# Altium PCB PANEL.PcbDoc
Units mm, origin at the board's own origin, x right, y up, seen from the top; angles counter-clockwise.
Board outline 200 x 110 mm, 4 copper layers (Top Layer, GND, Internal Plane 2, Bottom Layer), stack 2.281 mm thick; 2 components, 0 nets, 69 pads, 0 vias.
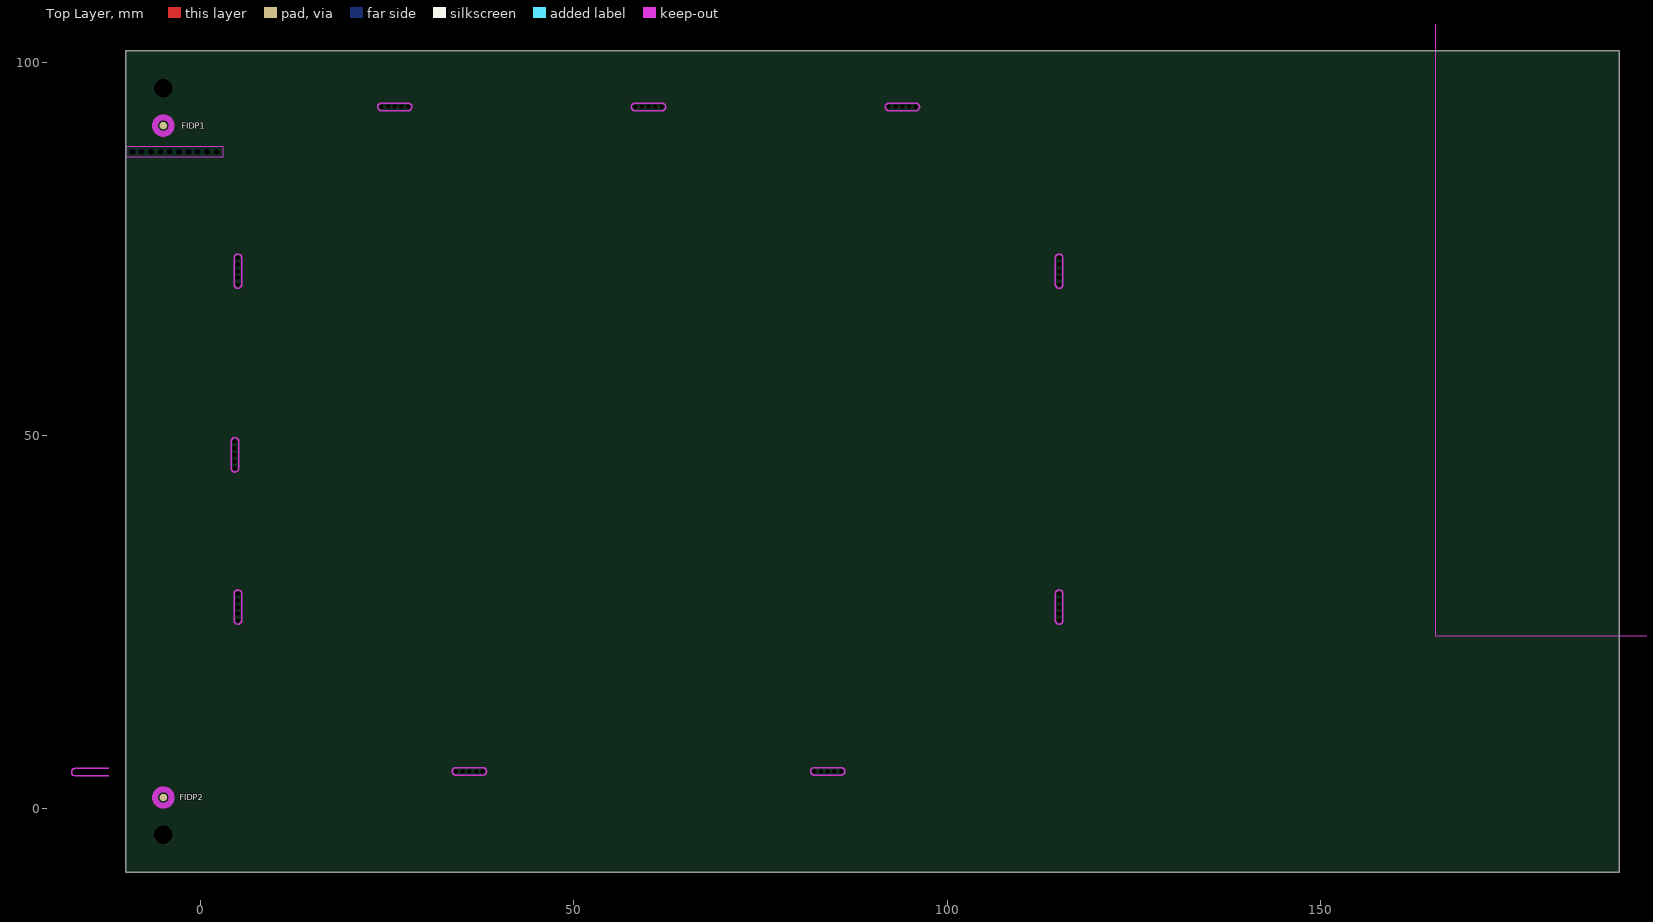
[diagram p0: Top Layer view]
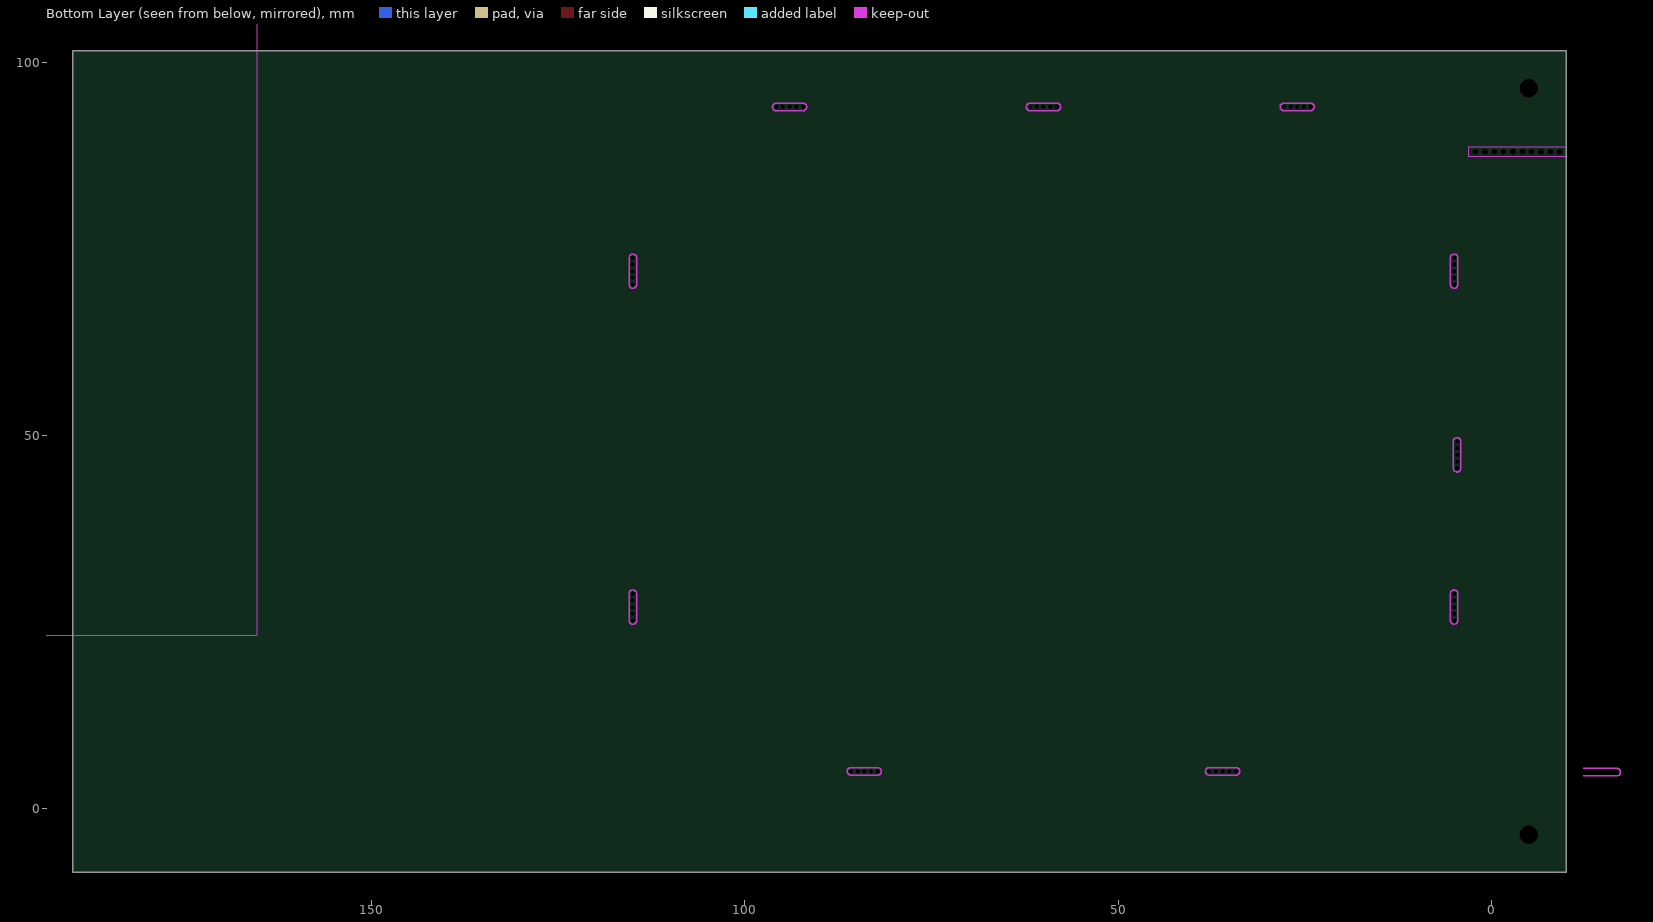
[diagram p1: Bottom Layer view, seen from below]
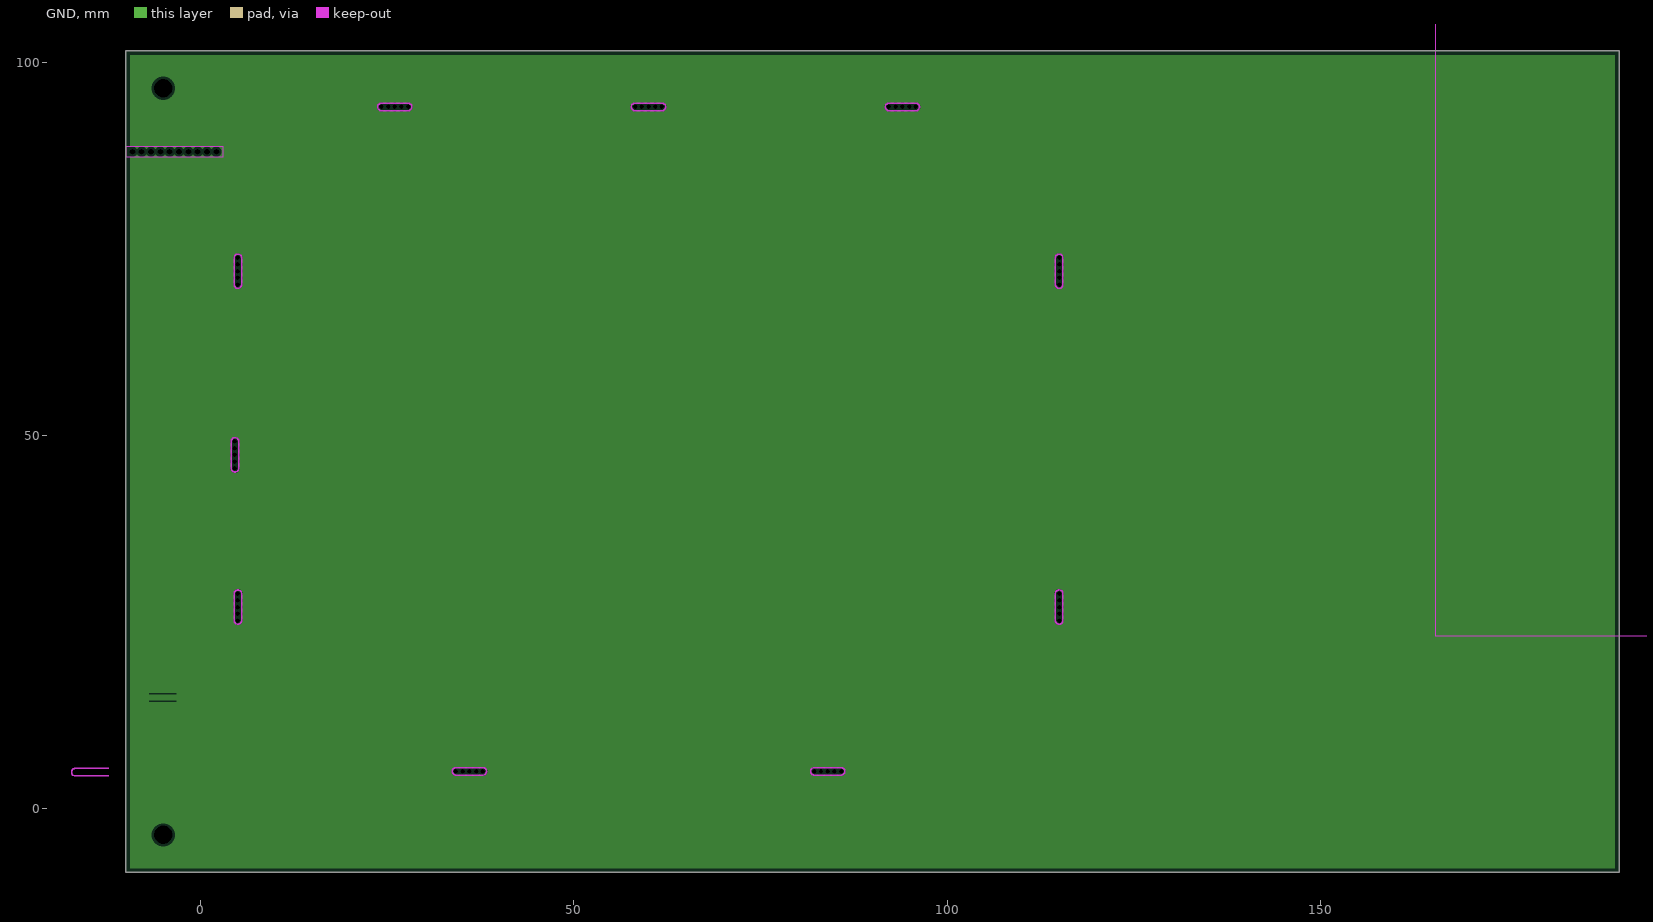
[diagram p2: GND, clearances drawn from the general rule]
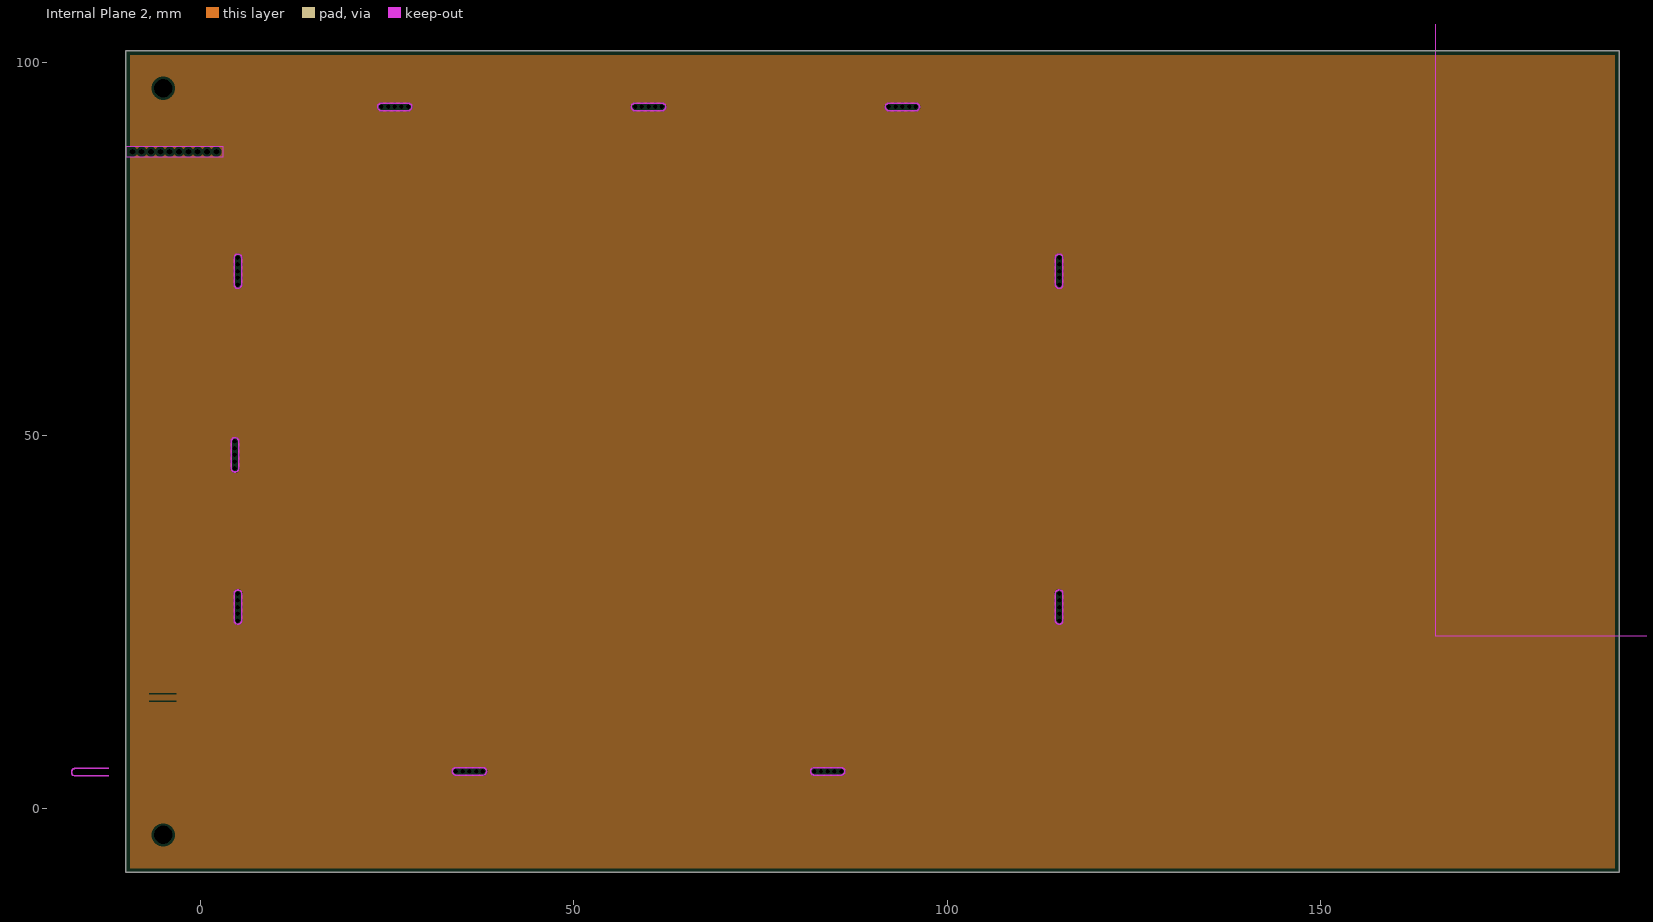
[diagram p3: Internal Plane 2, clearances drawn from the general rule]

## Layer stack, top to bottom
Top Solder: solder mask 0.0254, SM-001, Dk 4
Top Layer: signal copper 0.035
Dielectric 1: core 1.5, FR-4 TG140, Dk 3.96
GND: plane copper 0.035
Dielectric2: dielectric 0.32, FR-4, Dk 4.8
Internal Plane 2: plane copper 0.0356
Dielectric3: dielectric 0.32, FR-4, Dk 4.8
Bottom Layer: signal copper 0.035
Bottom Solder: solder mask 0.0254, SM-001, Dk 4

## Board outline
-10,-8.5 -10,101.5 190,101.5 190,-8.5

## Design rules (kind name [scope] priority, off if disabled: settings)
AcuteAngle [All] p1: minimum=6.00000000000000E+0001 checktracksonly=TRUE
AssemblyTestpoint [All] p1: testpointundercomponent=TRUE minsize=1 maxsize=2.5 preferedsize=1.5 minholesize=0 maxholesize=1 preferedholesize=0.8 testpointgrid=0.025 usegrid=TRUE gridtolerance=0 allowsidetop=TRUE allowsidebottom=TRUE
BoardOutlineClearance [(OnLayer('Top Layer') OR OnLayer('Bottom Layer'))] p1: gap=1 ignorepadtopadclearanceinfootprint=FALSE
Clearance [All] p1: gap=0.2 ignorepadtopadclearanceinfootprint=FALSE except(0: Arc-Hole Track-Hole SMDPad-Hole THPad-Hole Via-Hole Fill-Hole Poly-Hole Region-Hole Text-Hole)
ComponentClearance ComponentClearance_FID [Footprint Like('FID-1*')] p1: gap=0 collisioncheckmode=3 verticalgap=0 showdistances=FALSE
ComponentClearance [All] p2: gap=0.2 collisioncheckmode=3 verticalgap=0.2 showdistances=FALSE
DiffPairsRouting [All] p1: maxlimit=0.4 minlimit=0.2 mostfreqgap=0.2 toplayer_minwidth=0.3 toplayer_maxwidth=0.4 toplayer_prefwidth=0.3 bottomlayer_minwidth=0.3 bottomlayer_maxwidth=0.4 bottomlayer_prefwidth=0.3 maxuncoupledlength=12
FabricationTestpoint [All] p1: side=3 testpointundercomponent=TRUE minsize=1 maxsize=2.5 preferedsize=1.5 minholesize=0 maxholesize=1 preferedholesize=0.8 testpointgrid=0.025 allowsidetop=TRUE allowsidebottom=TRUE usegrid=TRUE gridtolerance=0
Height [All] p1: minheight=0 maxheight=50 prefheight=12
HoleSize [All] p1: absolutevalues=TRUE maxlimit=6 minlimit=0.3 maxpercent=80.000 minpercent=20.000
HoleToHoleClearance [All] p1: gap=0.3 allowstackedmicrovias=TRUE
MinimumAnnularRing [All] p1: minimumring=0.15
MinimumSolderMaskSliver [All] p1: minsoldermaskwidth=0.15
PlaneClearance [All] p1: clearance=0.3
PlaneConnect PlaneConnect_GND [(InNet('GND') and IsPad)] p1: pad.planeconnectstyle=Relief pad.reliefexpansion=0.3 pad.reliefentries=4 pad.reliefconductorwidth=0.5 pad.reliefairgap=0.2 via.planeconnectstyle=Direct via.reliefexpansion=0.3 via.reliefentries=4 via.reliefconductorwidth=0.5 via.reliefairgap=0.2
PlaneConnect [All] p2: planeconnectstyle=Direct reliefexpansion=0.5 reliefentries=4 reliefconductorwidth=0.2 reliefairgap=0.2
PolygonConnect [All] p1: thpad.connectstyle=Relief thpad.reliefconductorwidth=0.4 thpad.reliefentries=4 thpad.polygonreliefangle="90 Angle" thpad.airgapwidth=0.2 smdpad.connectstyle=Direct smdpad.reliefconductorwidth=0.3 smdpad.reliefentries=4 smdpad.polygonreliefangle="90 Angle" smdpad.airgapwidth=0.2 via.connectstyle=Direct via.reliefconductorwidth=0.2 via.reliefentries=4 via.polygonreliefangle="90 Angle" via.airgapwidth=0.2
RoutingCorners [All] p1: cornerstyle=45-Degree minsetback=0.5 maxsetback=2
RoutingVias [All] p1: holewidth=0.3 width=0.6 viastyle="Through Hole" minholewidth=0.3 minwidth=0.6 maxholewidth=0.6 maxwidth=1
SMDEntry [All] p1: side=TRUE corner=TRUE anyangle=TRUE
SMDToCorner [All] p1: distance=0
SilkToSilkClearance [All] p1: silktosilkclearance=0.1
SilkToSolderMaskClearance [IsPad] p1: minsilkscreentomaskgap=0.1 clearancetoexposedcopper=FALSE
SolderMaskExpansion SolderMaskExpansion-NPTH [PadIsPlated = 'False'] p1: expansion=0.1 istentingtop=FALSE soldermaskfromhole=TRUE
SolderMaskExpansion [All] p2: expansion=0.05 istentingtop=FALSE
SupplyNets SupplyNets_GND [InNet('GND')] p1: voltage=0,000
SupplyNets SupplyNets+5V [InNet('+5V')] p2: voltage=5,000
SupplyNets SupplyNets+3V3 [InNet('+3V3')] p3: voltage=3,000
UnRoutedNet [All] p1: checkbadconnections=TRUE
Width [All] p1: maxlimit=5 minlimit=0.2 preferedwidth=0.2 minimp=50.000000 maximp=50.000000 favimp=50.000000
16 further rules are at their usual default settings.

## Classes and differential pairs
component class "CAN Driver": LNK1
component class IC2: BT1

## Components (designator, comment, footprint, x,y, rotation, side; value= is the part's Value field where it differs from the comment)
FIDP1 "Panel Fiducial" FID-1-3MM -5,91.5 r0 top
FIDP2 "Panel Fiducial" FID-1-3MM -5,1.5 r0 top

## Footprints (in the part's own frame and the unit in brackets; to place one, negate y for a bottom-side part, rotate by r counter-clockwise, add the part's x,y. Pads: shape width x height; smd on the part's side, far side on the other; paste and mask are expansions set on the pad)
FID-1-3MM [mm] "Fiducial 1.0mm Diameter, 3.0mm Mask"
  round 1 smd paste-1 mask+1: 1(0,0)
  Top Layer keep-out circle w0.8: c0,0 r1.1

## Free pads (board coordinates)
  round 0 hole 0.6 unplated mask+0.2: MB(-16.8,4.9) MB(-15.9,4.9) MB(-15,4.9) MB(-14.1,4.9) MB(-13.2,4.9) MB(4.6,45.6) MB(4.6,46.5) MB(4.6,47.4) MB(4.6,48.3) MB(4.6,49.2) MB(5,25.2) MB(5,26.1) MB(5,27) MB(5,27.9) MB(5,28.8) MB(5,70.2) MB(5,71.1) MB(5,72) MB(5,72.9) MB(5,73.8) MB(24.2,94) MB(25.1,94) MB(26,94) MB(26.9,94) MB(27.8,94) MB(34.2,5) MB(35.1,5) MB(36,5) MB(36.9,5) MB(37.8,5) MB(58.2,94) MB(59.1,94) MB(60,94) MB(60.9,94) MB(61.8,94) MB(82.2,5) MB(83.1,5) MB(84,5) MB(84.9,5) MB(85.8,5) MB(92.2,94) MB(93.1,94) MB(94,94) MB(94.9,94) MB(95.8,94) MB(115,25.2) MB(115,26.1) MB(115,27) MB(115,27.9) MB(115,28.8) MB(115,70.2) MB(115,71.1) MB(115,72) MB(115,72.9) MB(115,73.8)
  round 0 hole 0.8 unplated mask+0.2: MB(-9.15,88) MB(-7.9,88) MB(-6.65,88) MB(-5.4,88) MB(-4.15,88) MB(-2.9,88) MB(-1.65,88) MB(-0.4,88) MB(0.85,88) MB(2.1,88)
  round 0 hole 2.5 unplated: RH(-5,-3.5) RH(-5,96.5)

## Nets (pads, with @x,y where several pads share a name; then routed paths per layer and width w, separated by ;. In a path a pad name is that pad's centre, name@x,y a point inside that pad or via, vN(x,y) a via of type N, cw(c..) or ccw(c..) an arc to the next point about the centre after c; other vN are vias at no path point)
pads on no net: FIDP1.1 FIDP2.1

## Polygon pours and split planes (outlines as drawn)
no net on GND (split plane): 189.49,-7.99 -9.49,-7.99 -9.49,100.99 189.49,100.99
no net on Internal Plane 2 (split plane): 189.49,-7.99 -9.49,-7.99 -9.49,100.99 189.49,100.99

## Keep-outs
Keep-Out Layer:
  rectangle: 165.4,23.2 341.4,112.2
  region: 3,88.7 -10,88.7 -10,87.3 3,87.3
  lines w0.2: -12.3,4.4 -16.8,4.4 cw(c-16.8,4.9) -16.8,5.4 -12.3,5.4 ; 4.1,45.6 ccw(c4.6,45.6) 5.1,45.6 5.1,49.2 ccw(c4.6,49.2) 4.1,49.2 4.1,45.6 ; 4.5,25.2 ccw(c5,25.2) 5.5,25.2 5.5,28.8 ccw(c5,28.8) 4.5,28.8 4.5,25.2 ; 4.5,70.2 ccw(c5,70.2) 5.5,70.2 5.5,73.8 ccw(c5,73.8) 4.5,73.8 4.5,70.2 ; 24.2,93.5 cw(c24.2,94) 24.2,94.5 27.8,94.5 cw(c27.8,94) 27.8,93.5 24.2,93.5 ; 34.2,4.5 cw(c34.2,5) 34.2,5.5 37.8,5.5 cw(c37.8,5) 37.8,4.5 34.2,4.5 ; 58.2,93.5 cw(c58.2,94) 58.2,94.5 61.8,94.5 cw(c61.8,94) 61.8,93.5 58.2,93.5 ; 82.2,4.5 cw(c82.2,5) 82.2,5.5 85.8,5.5 cw(c85.8,5) 85.8,4.5 82.2,4.5 ; 92.2,93.5 cw(c92.2,94) 92.2,94.5 95.8,94.5 cw(c95.8,94) 95.8,93.5 92.2,93.5 ; 114.5,25.2 ccw(c115,25.2) 115.5,25.2 115.5,28.8 ccw(c115,28.8) 114.5,28.8 114.5,25.2 ; 114.5,70.2 ccw(c115,70.2) 115.5,70.2 115.5,73.8 ccw(c115,73.8) 114.5,73.8 114.5,70.2

## Other copper
GND (plane layer: these items are gaps in the copper):
  lines w0.2: -6.9,14.4 -3.3,14.4 ; -6.9,15.4 -3.3,15.4
Internal Plane 2 (plane layer: these items are gaps in the copper):
  lines w0.2: -6.9,14.4 -3.3,14.4 ; -6.9,15.4 -3.3,15.4

## Silkscreen, mask and mechanical layers (free items; w line width, h text height)
Top Paste:
  circle w1.4: c-5,96.5 r0.55
  circle w1.4: c-5,-3.5 r0.55
  region: 9.9,-9.3
Top Solder:
  rectangle: 114.5,70.2 115.5,73.8
  rectangle: 114.5,25.2 115.5,28.8
  region: 5.5,28.8 4.5,28.8 4.5,25.2 5.5,25.2
  region: 5.5,73.8 4.5,73.8 4.5,70.2 5.5,70.2
  region: 34.2,5.5 34.2,4.5 37.8,4.5 37.8,5.5
  region: 61.8,93.5 61.8,94.5 58.2,94.5 58.2,93.5
  region: 82.2,5.5 82.2,4.5 85.8,4.5 85.8,5.5
  region: 95.8,93.5 95.8,94.5 92.2,94.5 92.2,93.5
  region: 27.8,93.5 27.8,94.5 24.2,94.5 24.2,93.5
  region: 5.1,49.2 4.1,49.2 4.1,45.6 5.1,45.6
  region: -9.15,88.6 -9.15,87.4 2.1,87.4 2.1,88.6
Bottom Solder:
  rectangle: 114.5,70.2 115.5,73.8
  rectangle: 114.5,25.2 115.5,28.8
  region: 5.5,28.8 4.5,28.8 4.5,25.2 5.5,25.2
  region: 5.5,73.8 4.5,73.8 4.5,70.2 5.5,70.2
  region: 34.2,5.5 34.2,4.5 37.8,4.5 37.8,5.5
  region: 61.8,93.5 61.8,94.5 58.2,94.5 58.2,93.5
  region: 82.2,5.5 82.2,4.5 85.8,4.5 85.8,5.5
  region: 95.8,93.5 95.8,94.5 92.2,94.5 92.2,93.5
  region: 27.8,93.5 27.8,94.5 24.2,94.5 24.2,93.5
  region: 5.1,49.2 4.1,49.2 4.1,45.6 5.1,45.6
  region: -9.1,88.6 -9.1,87.4 2.15,87.4 2.15,88.6
Panel Outline:
  lines w0.1: 3.2,48.7 3.2,90 cw(c8.8,90) 8.8,95.6 23.903,95.6 cw(c23.903,94.8) 23.903,94 ; 3.4,24.903 cw(c4.2,24.903) 5,24.903 ; 3.4,29.097 ccw(c4.2,29.097) 5,29.097 ; 3.4,69.903 cw(c4.2,69.903) 5,69.903 ; 3.4,74.097 ccw(c4.2,74.097) 5,74.097 ; 5,49.897 5,90 cw(c9,90) 9,94 23.905,94 ; 28.097,94 cw(c28.097,94.8) 28.097,95.6 ; 33.903,3.4 ccw(c33.903,4.2) 33.903,5 ; 38.097,3.4 cw(c38.097,4.2) 38.097,5 ; 42,94 cw(c42,89) 47,89 47,77.5 ; 47,71.5 47,57 ccw(c52,57) 52,52 57,52 ccw(c57,53.5) 57,55 ; 47,71.5 cw(c48.5,71.5) 50,71.5 ; 47,77.5 ccw(c48.5,77.5) 50,77.5 50,92 cw(c52,92) 52,94 ; 50,71.505 50,57 ccw(c52,57) 52,55 57.004,55 ; 57.903,94 ccw(c57.903,94.8) 57.903,95.6 ; 62.097,94 cw(c62.097,94.8) 62.097,95.6 ; 62.996,55 68,55 ccw(c68,57) 70,57 70,71.5 cw(c71.5,71.5) 73,71.5 73,57 cw(c68,57) 68,52 63,52 cw(c63,53.5) 63,55 ; 68,94 cw(c68,92) 70,92 70,77.5 ccw(c71.5,77.5) 73,77.5 73,89 cw(c78,89) 78,94 ; 81.903,3.4 ccw(c81.903,4.2) 81.903,5 ; 86.097,3.4 cw(c86.097,4.2) 86.097,5 ; 91.903,94 ccw(c91.903,94.8) 91.903,95.6 ; 96.097,94 cw(c96.097,94.8) 96.097,95.6 ; 115,24.903 cw(c115.8,24.903) 116.6,24.903 ; 115,29.097 ccw(c115.8,29.097) 116.6,29.097 ; 115,69.903 cw(c115.8,69.903) 116.6,69.903 ; 115,74.097 ccw(c115.8,74.097) 116.6,74.097 ; 190,-8.5 -10,-8.5 -10,101.5 190,101.5
Top Courtyard:
  lines w0.1: -10,4.05 -10,5.95 ; -10,5 -9.15,5 ; -10,87.05 -10,88.95 ; -10,88 -9.15,88 ; 3.5,43.5 4.5,43.5 ; 3.5,49.5 4.5,49.5 ; 4,43.5 4,44 ; 4,49 4,49.5 ; 5,46 5,47 ; 5,46.5 5.5,46.5 ; 36.5,88.5 36.5,89.5 ; 36.5,89 37,89 ; 39,88 40,88 ; 39.5,87.5 39.5,88 ; 42,89 42.5,89 ; 42.5,3.5 42.5,4.5 ; 42.5,4 43,4 ; 42.5,88.5 42.5,89.5 ; 45,5 46,5 ; 45.5,5 45.5,5.5 ; 48,4 48.5,4 ; 48.5,3.5 48.5,4.5 ; 87.5,3.5 87.5,4.5 ; 87.5,4 88,4 ; 89.4,88.5 89.4,89.5 ; 89.4,89 89.9,89 ; 90,5 91,5 ; 90.5,5 90.5,5.5 ; 91.9,88 92.9,88 ; 92.4,87.5 92.4,88 ; 93,4 93.5,4 ; 93.5,3.5 93.5,4.5 ; 94.9,89 95.4,89 ; 95.4,88.5 95.4,89.5 ; 141.5,3.5 141.5,4.5 ; 141.5,4 142,4 ; 142,88.5 142,89.5 ; 142,89 142.5,89 ; 144,5 145,5 ; 144.5,5 144.5,5.5 ; 144.5,88 145.5,88 ; 145,87.5 145,88 ; 147,4 147.5,4 ; 147.5,3.5 147.5,4.5 ; 147.5,89 148,89 ; 148,88.5 148,89.5 ; 174.5,46.5 175,46.5 ; 175,46 175,47 ; 175.5,43.5 176.5,43.5 ; 175.5,49.5 176.5,49.5 ; 176,43.5 176,44 ; 176,49 176,49.5 ; 189.15,5 190,5 ; 189.15,88 190,88 ; 190,4.05 190,5.95 ; 190,87.05 190,88.95
Route Tool Path:
  lines w2: 4,4 4,43.5 ; 4,49.5 -0.4,53.9 -0.4,99.2 36.5,99.2

## Panel: embedded boards
"SOLC5-G031.PcbDoc" at 5,5, 1 rows x 1 columns, spacing 83 x 170, rotation 0